# Altium PCB Power Board.PcbDoc
Units mil, origin at the board's own origin, x right, y up, seen from the top; angles counter-clockwise.
Board outline 4650 x 2500 mil, 2 copper layers (Top Layer, Bottom Layer); 55 components, 41 nets, 209 pads, 45 vias.
Unrouted connection lines stored in the file: 2.
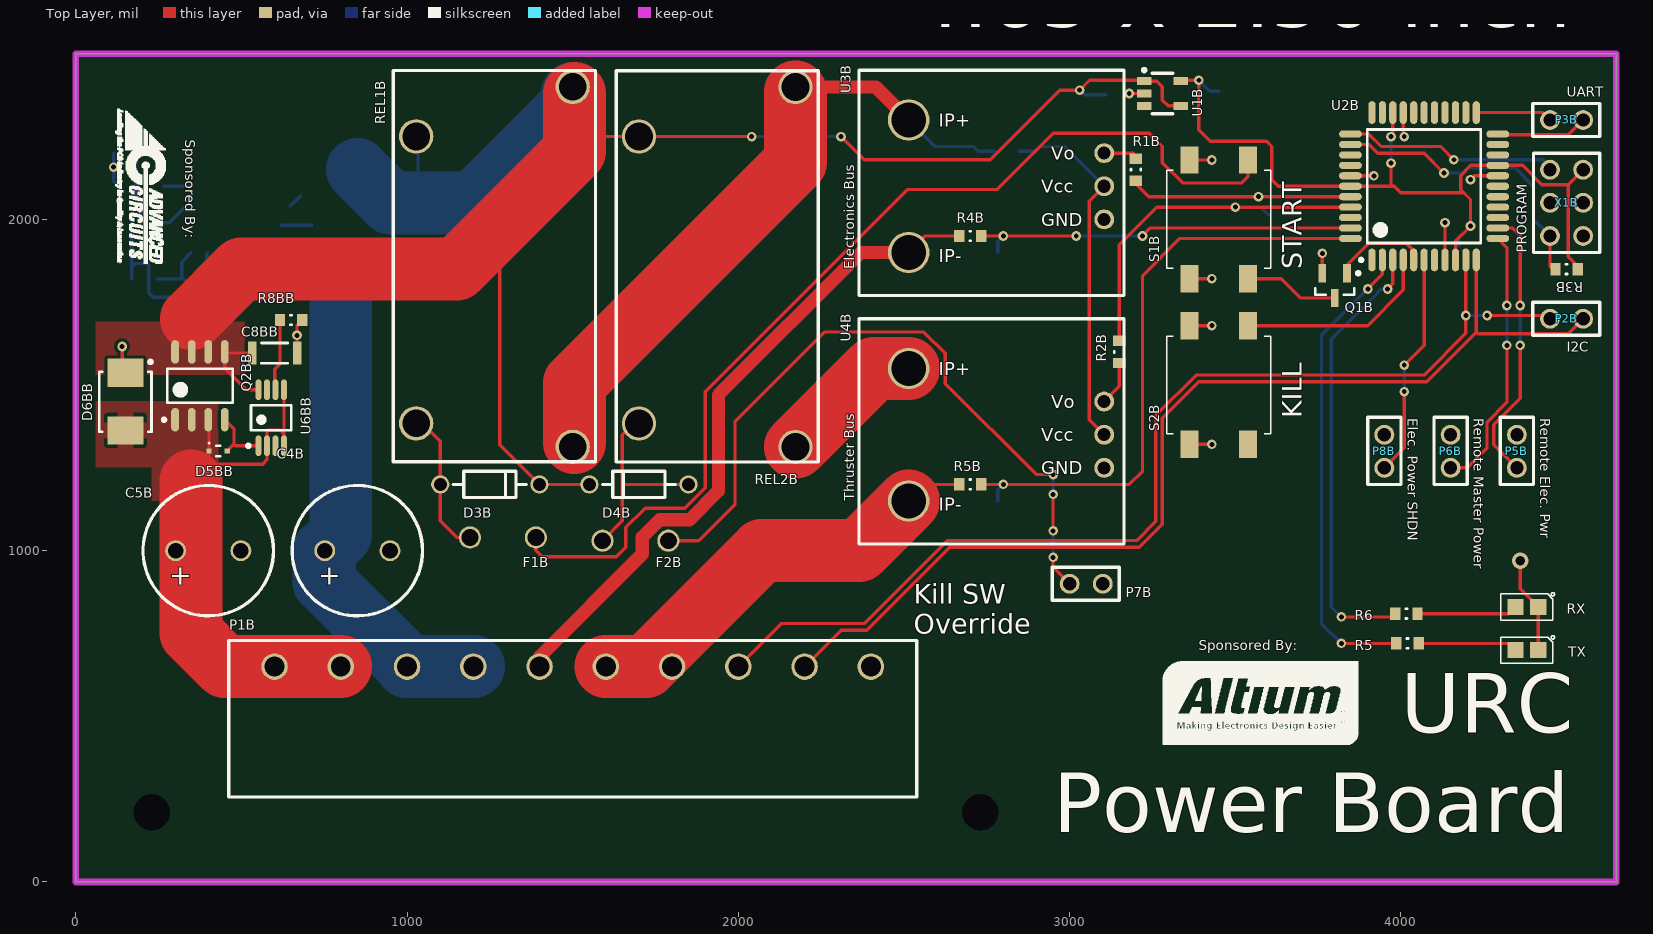
[diagram p0: Top Layer view]
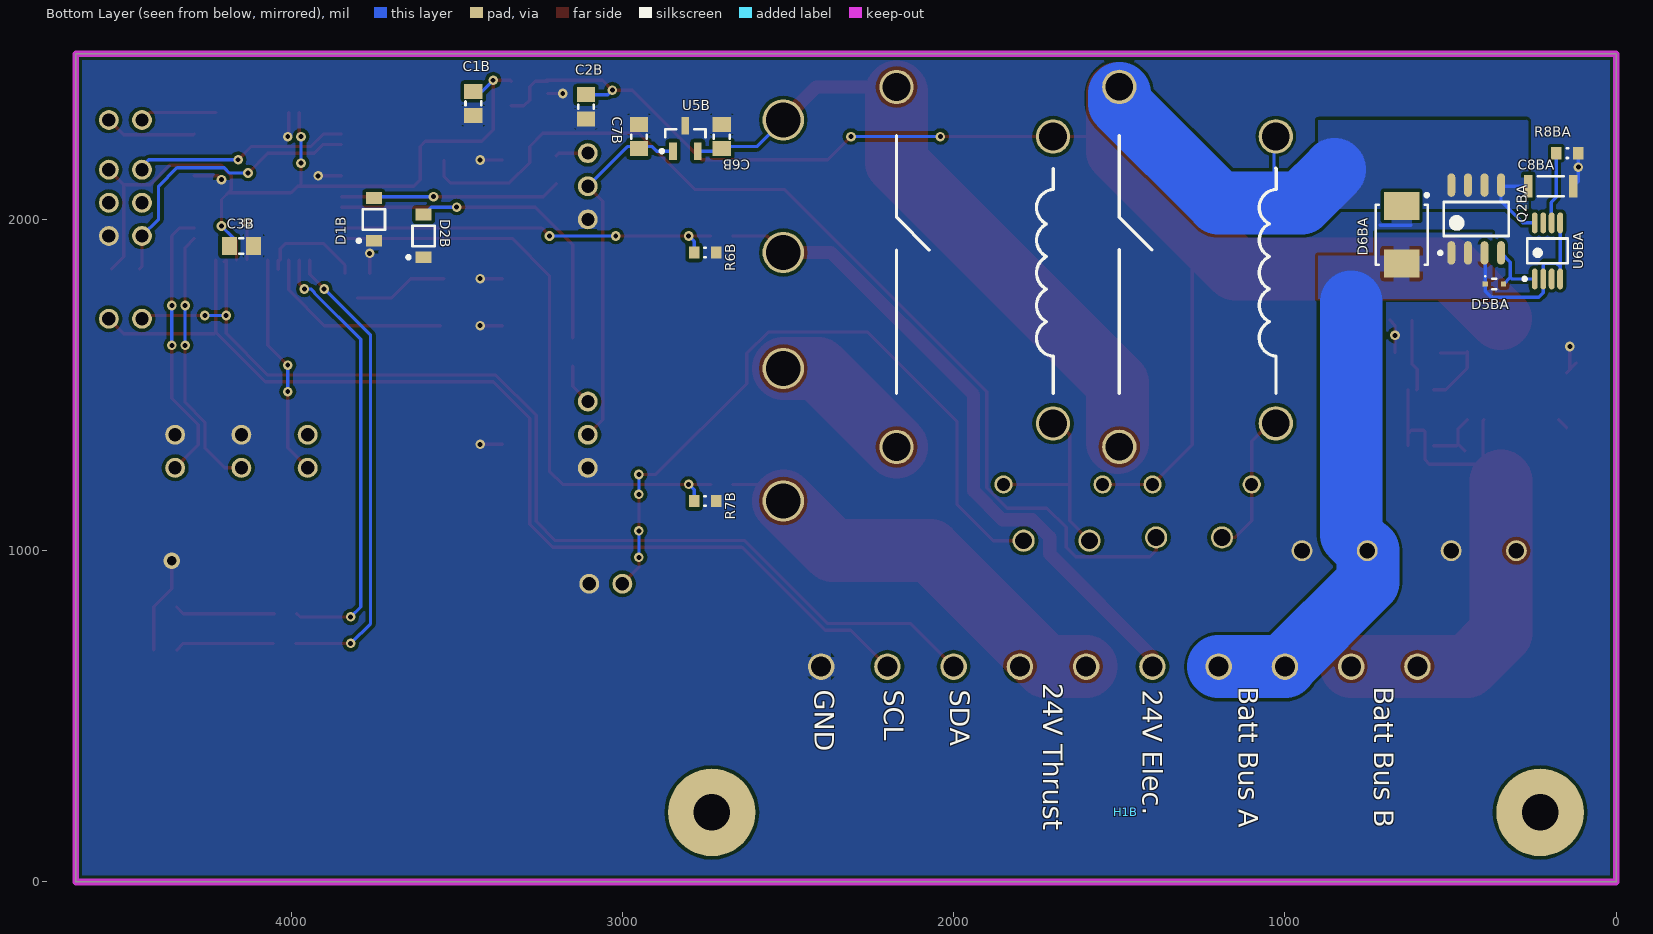
[diagram p1: Bottom Layer view, seen from below]

## Layer stack, top to bottom
Top Solder: solder mask 0.4, Solder Resist, Dk 3.5
Top Layer: signal copper 1.4
Dielectric 1: dielectric 12.6, FR-4, Dk 4.8
Bottom Layer: signal copper 1.4
Bottom Solder: solder mask 0.4, Solder Resist, Dk 3.5

## Board outline
0,0 0,2500 900,2500 4650,2500 4650,0

## Design rules (kind name [scope] priority, off if disabled: settings)
Clearance [All] p1: gap=10 ignorepadtopadclearanceinfootprint=FALSE except(0: Arc-Hole Track-Hole SMDPad-Hole THPad-Hole Via-Hole Fill-Hole Poly-Hole Region-Hole Text-Hole; 6: SMDPad-SMDPad)
Height [All] p1: minheight=0 maxheight=3000 prefheight=500
HoleSize [All] p1: absolutevalues=TRUE maxlimit=110 minlimit=15 maxpercent=80.000 minpercent=20.000
MinimumSolderMaskSliver [All] p1: minsoldermaskwidth=0
PolygonConnect GND [InNet('GND')] p1: connectstyle=Relief reliefconductorwidth=60 reliefentries=4 polygonreliefangle="90 Angle" airgapwidth=10
PolygonConnect Vias [IsVia and InNet('GND')] p2: connectstyle=Direct reliefconductorwidth=10 reliefentries=4 polygonreliefangle="90 Angle" airgapwidth=10
PolygonConnect "Battery Power" [InNet('BATTA') Or InNet('BATTB') Or InNet('RAW_24V')] p3: connectstyle=Relief reliefconductorwidth=50 reliefentries=4 polygonreliefangle="90 Angle" airgapwidth=10
PolygonConnect [All] p4: connectstyle=Relief reliefconductorwidth=10 reliefentries=4 polygonreliefangle="90 Angle" airgapwidth=10
RoomDefinition "U_Power Conditioning" [InComponentClass('U_Power Conditioning')] p1: confinementstyle=ConfineIn formatcopy=TRUE lockcomponents=FALSE outline -1000,-3400 1000,-3400 1000,-2400 -1000,-2400
RoomDefinition "Power Board" [InComponentClass('Power Board')] p2: confinementstyle=ConfineIn formatcopy=TRUE lockcomponents=FALSE outline -1000,-3400 1000,-3400 1000,-2400 -1000,-2400
RoomDefinition D1 [InComponentClass('D1')] p3: confinementstyle=ConfineIn formatcopy=TRUE lockcomponents=FALSE outline 50,1750 50,2250 750,2250 750,1750
RoomDefinition D2 [InComponentClass('D2')] p4: confinementstyle=ConfineIn formatcopy=TRUE lockcomponents=FALSE outline 750,1246.46 750,1746.46 50,1746.46 50,1246.46
RoutingVias [All] p1: holewidth=28 width=50 viastyle="Through Hole" minholewidth=28 minwidth=50 maxholewidth=28 maxwidth=50
SilkToSilkClearance [All] p1: silktosilkclearance=7
SilkToSolderMaskClearance [IsPad] p1: minsilkscreentomaskgap=0 clearancetoexposedcopper=FALSE
SolderMaskExpansion "Tented Vias" [IsVia] p1: expansion=-50
SolderMaskExpansion [All] p2: expansion=4
Width [All] p1: maxlimit=200 minlimit=10 preferedwidth=10
25 further rules are at their usual default settings.

## Classes and differential pairs
component class D1: C8BA D5BA D6BA Q2BA R8BA U6BA
component class D2: C8BB D5BB D6BB Q2BB R8BB U6BB
component class U_Microcontroller: C1B C2B C3B D1B D2B P2B P3B R1B R2B R3B R5 R6 RX TX U1B U2B X1B X6 X7
component class "U_Power Conditioning": C4B C5B C6B C7B D3B D4B F1B F2B P7B Q1B R4B R5B R6B R7B REL1B REL2B S1B S2B U3B U4B U5B
channel class "Diode Controllers": D1 D2 D3 D4
component class "Power Board": H1B P1B P5B P6B P8B

## Components (designator, comment, footprint, x,y, rotation, side; value= is the part's Value field where it differs from the comment)
C1B "0.1uF, C0805, AVX" C0805 3450,2350 r270 bottom value=0.1uF
C2B "0.1uF, C0805, AVX" C0805 3110,2340 r270 bottom value=0.1uF
C3B "0.1uF, C0805, AVX" C0805 4150,1920 r180 bottom value=0.1uF
C4B "330uF, Panasonic, 35V" "10mm Radial Cap, Generic" 850,1000 r0 top
C5B "330uF, Panasonic, 35V" "10mm Radial Cap, Generic" 400,1000 r0 top
C6B "0.1uF, C0805, AVX" C0805 2700,2250 r90 bottom value=0.1uF
C7B "0.1uF, C0805, AVX" C0805 2950,2250 r90 bottom value=0.1uF
C8BA "2.2uF, C1206 TY , Ceramic MLCC" C1206 197.75,2100 r0 bottom value=2.2uF (schematic designator C8B)
C8BB "2.2uF, C1206 TY , Ceramic MLCC" C1206 600,1596.46 r180 top value=2.2uF (schematic designator C8B)
D1B "MMSZ3V3T1G, 3V3 Zener Diode" ONSC-SOD123-2-498_A_V 3750,2000 r90 bottom value=3V3
D2B "MMSZ3V3T1G, 3V3 Zener Diode" ONSC-SOD123-2-498_A_V 3600,1950 r90 bottom value=3V3
D3B "Diode" DO-35-0.3 1250,1200 r0 top
D4B "Diode" DO-35-0.3 1700,1200 r180 top
D5BA "MM5Z12VT1G, 12V Zener" ONSC-SOD-523-2-502-01_C_V 367.75,1804.8 r180 bottom (schematic designator D5B)
D5BB "MM5Z12VT1G, 12V Zener" ONSC-SOD-523-2-502-01_C_V 430,1301.26 r0 top (schematic designator D5B)
D6BA "Bidirectional Zener" ONSC-SMB-2-403A-03_H_V 647.75,1953.54 r270 bottom value=28.2V (schematic designator D6B)
D6BB "Bidirectional Zener" ONSC-SMB-2-403A-03_H_V 150,1450 r270 top value=28.2V (schematic designator D6B)
F1B "PTC Fuse, LVR008NS" "LVR008NS - Resettable Fuse" 1190,1040 r0 top
F2B "PTC Fuse, LVR008NS" "LVR008NS - Resettable Fuse" 1590,1030 r0 top
H1B "Holes - x inch" "110mil Holes - 2.5  Inch" 1480,210 r180 top
P1B "MSTBA 2,5/10-G-5,08" "MSTBA 2,5/10-G-5,08" 600,650 r0 top
P2B "Header" "1x2 Header" 4500,1700 r180 top
P3B "Header" "1x2 Header" 4500,2300 r180 top
P5B "Header" "1x2 Header" 4350,1300 r90 top
P6B "Header" "1x2 Header" 4150,1300 r90 top
P7B "Header" "1x2 Header" 3050,900 r180 top
P8B "Header" "1x2 Header" 3950,1300 r90 top
Q1B "N-MOSFET" 2N7002-SOT23 3800,1800 r270 top
Q2BA "BSO033N03MS G" INF-PG-DSO-8-3_N 422.75,2001.18 r90 bottom (schematic designator Q2B)
Q2BB "BSO033N03MS G" INF-PG-DSO-8-3_N 375,1497.64 r90 top (schematic designator Q2B)
R1B "Resistor" R0603 3200,2150 r90 top value=680
R2B "Resistor" R0603 3150,1600 r270 top value=680
R3B "Resistor" R0603 4500,1850 r0 top value=10K
R4B "Resistor" R0603 2700,1950 r180 top value=10K
R5 "Resistor" R0603 4020,720 r0 top value=1K
R5B "Resistor" R0603 2700,1200 r180 top value=10K
R6 "Resistor" R0603 4016.54,810 r0 top value=1K
R6B "Resistor" R0603 2750,1900 r0 bottom value=2K
R7B "Resistor" R0603 2750,1150 r0 bottom value=2K
R8BA "Resistor" R0603 147.75,2200 r0 bottom value=1K (schematic designator R8B)
R8BB "Resistor" R0603 650,1696.46 r180 top value=1K (schematic designator R8B)
REL1B "ALFG2PF24" "LF-G SERIES RELAY" 1500,2400 r270 top
REL2B "ALFG2PF24" "LF-G SERIES RELAY" 2172.44,2399.61 r270 top
RX "LED" LED0805 4380,830 r90 top (schematic designator D4)
S1B "FSM2JSMA" FSM2JSMA 3450,2000 r0 top
S2B "FSM2JSMA" FSM2JSMA 3450,1500 r180 top
TX "LED" LED0805 4380,700 r90 top (schematic designator D3)
U1B "MCP1804T-3302I/OT" MCP1804T-3302I/OT 3280,2380 r270 top
U2B "ATxmega16D4-AU" 44A_N 4070,2100 r90 top
U3B "AC715 Current Sensor" "AC715 Current Sensor" 3104.33,2100 r0 top
U4B "AC715 Current Sensor" "AC715 Current Sensor" 3104.33,1350 r0 top
U5B "LM3480" LM4040-SOT23-3 2810,2244.33 r90 bottom
U6BA "LTC4359CMS8#PBF" LT-MS8-8_N 207.75,1904.8 r90 bottom (schematic designator U6B)
U6BB "LTC4359CMS8#PBF" LT-MS8-8_N 590,1401.26 r90 top (schematic designator U6B)
X1B "Header" "2X3 HEADER" 4500,2050 r270 top

## Footprints (in the part's own frame and the unit in brackets; to place one, negate y for a bottom-side part, rotate by r counter-clockwise, add the part's x,y. Pads: shape width x height; smd on the part's side, far side on the other; paste and mask are expansions set on the pad)
"1x2 Header" [mil]
  round 60 hole 40: 1(-50,0) 2(50,0)
  silkscreen extent -100,-50 102,50, body extent -100,-50 100,50, height 374
2N7002-SOT23 [mm] "SOT23, 3-Leads, Body 3.0x2.5mm (max), Pitch 0.95mm, IPC Medium Density"
  rect 1.4x0.6 smd: D(0.95,0) G(-0.95,0.95) S(-0.95,-0.95)
  silkscreen extent -1.07,-1.5 0.7,1.93, body extent -0.7,-1.5 0.7,1.5, height 1.1
"2X3 HEADER" [mil]
  round 60 hole 40: 1(-100,-50) 2(-100,50) 3(0,-50) 4(0,50) 5(100,-50) 6(100,50)
  silkscreen extent -150,-100 150,100, body extent -150,-100 150,100, height 374
"10mm Radial Cap, Generic" [mm]
  round 1.6 hole 1.2: 1(-2.5,0) 2(2.5,0)
  silkscreen extent -5,-5 5,5, body extent -5,-5 5,5, height 23
44A_N [mm] "Thin QFP, 44-Leads, Body 10x10mm, Pitch 0.8mm, IPC Medium Density"
  oval 1.75x0.55 smd: 1(-5.65,4) 2(-5.65,3.2) 3(-5.65,2.4) 4(-5.65,1.6) 5(-5.65,0.8) 6(-5.65,0) 7(-5.65,-0.8) 8(-5.65,-1.6) 9(-5.65,-2.4) 10(-5.65,-3.2) 11(-5.65,-4) 23(5.65,-4) 24(5.65,-3.2) 25(5.65,-2.4) 26(5.65,-1.6) 27(5.65,-0.8) 28(5.65,0) 29(5.65,0.8) 30(5.65,1.6) 31(5.65,2.4) 32(5.65,3.2) 33(5.65,4)
  oval 0.55x1.75 smd: 12(-4,-5.65) 13(-3.2,-5.65) 14(-2.4,-5.65) 15(-1.6,-5.65) 16(-0.8,-5.65) 17(0,-5.65) 18(0.8,-5.65) 19(1.6,-5.65) 20(2.4,-5.65) 21(3.2,-5.65) 22(4,-5.65) 34(4,5.65) 35(3.2,5.65) 36(2.4,5.65) 37(1.6,5.65) 38(0.8,5.65) 39(0,5.65) 40(-0.8,5.65) 41(-1.6,5.65) 42(-2.4,5.65) 43(-3.2,5.65) 44(-4,5.65)
  silkscreen extent -5.77,-4.35 4.35,4.95, body extent -5,-5 5,5, height 1.2
"110mil Holes - 2.5  Inch" [mil]
  round 0 hole 110: 0(-1250,0) 0(1250,0)
  round 264 smd far side: 0(-1250,0) 0(1250,0)
"AC715 Current Sensor" [mil]
  round 125 hole 105: 1(-590,200) 2(-590,-200)
  round 60 hole 39.37: 3(0,-100) 4(0,100) 5(0,0)
  silkscreen extent -740,-330 60,350, body extent -740,-350 60,350, height 600
C0805 [mm] "Chip Capacitor, 2-Leads, Body 2.0x1.3mm, IPC Medium Density"
  rect 1.15x1.4 smd: 1(-0.925,0) 2(0.925,0)
  silkscreen extent -0.15,-0.6 0.15,0.6, body extent -1,-0.63 1,0.63, height 0.6
C1206 [mm] "Chip Capacitor, 2-Leads, Body 3.2x1.6mm, IPC Medium Density"
  rect 0.65x1.75 smd: 1(-1.725,0) 2(1.725,0)
  silkscreen extent -1,-0.77 1,0.77, body extent -1.6,-0.8 1.6,0.8, height 1.3
DO-35-0.3 [mm] "0.3\" Diode DO-35"
  round 1.4 hole 1: 1(-3.8,0) 2(3.8,0)
  silkscreen extent -2.8,-1 2.8,1
FSM2JSMA [mm] "SPST OFF-MOM Switch"
  rect 1.4x2.1 smd: 1(2.24,4.55) 2(2.24,-4.55) 3(-2.24,4.55) 4(-2.24,-4.55)
  silkscreen extent -4,-3.75 4,3.75, body extent -3,-5 3,5, height 4.28
INF-PG-DSO-8-3_N [mm] "SOP, 8-Leads, Body 4.9x3.9mm, Pitch 1.27mm, IPC Medium Density"
  oval 1.8x0.6 smd: 1(-2.6,1.905) 2(-2.6,0.635) 3(-2.6,-0.635) 4(-2.6,-1.905) 5(2.6,-1.905) 6(2.6,-0.635) 7(2.6,0.635) 8(2.6,1.905)
  silkscreen extent -2.72,-2.5 1.3,2.88, body extent -2,-2.5 2,2.5, height 1.75
LED0805 [mm] "0805 LED"
  rect 1.2x1.25 smd: 1(0,-0.875) 2(0,0.875)
  silkscreen extent -1,-2.13 1.1,2
"LF-G SERIES RELAY" [mm]
  round 2.635 hole 2.127: 1(25.8,-12) 2(3.8,-12) 3(27.6,0) 4(0,0)
  silkscreen extent -1.25,-13.75 28.75,1.75, body extent -1.25,-13.88 28.85,1.83, height 23.3
LM4040-SOT23-3 [mm] "LM4040, Precision fixed/adjustable regulator"
  rect 1.35x0.6 smd: 1(-0.975,0.95) 2(-0.975,-0.95) 3(0.975,0)
  silkscreen extent -1.1,-1.55 0.7,1.93, body extent -0.7,-1.55 0.7,1.55, height 1.15
LT-MS8-8_N [mm] "SOP, 8-Leads, Body 3.1x3.1mm, Pitch 0.65mm, IPC Medium Density"
  oval 1.6x0.45 smd: 1(-2.15,0.975) 2(-2.15,0.325) 3(-2.15,-0.325) 4(-2.15,-0.975) 5(2.15,-0.975) 6(2.15,-0.325) 7(2.15,0.325) 8(2.15,0.975)
  silkscreen extent -2.27,-1.55 0.95,1.88, body extent -1.55,-1.55 1.55,1.55, height 1.1
"LVR008NS - Resettable Fuse" [mm] "5x20mm Fuse Holder"
  round 1.7 hole 1.3: 1(0,0) 2(5.05,0)
  body extent -2.13,-3.27 7.24,3.29, height 15.45
MCP1804T-3302I/OT [mm] "SOT-23"
  rect 0.6x1.1 smd: NC(0.95,-1.4) SHDN(0.95,1.4) Vin(-0.95,-1.4) Vout(-0.95,1.4) Vss(0,-1.4)
  silkscreen extent -1.8,-1.4 1.55,0.8, body extent -1.5,-1.63 1.5,1.58, height 0.92
"MSTBA 2,5/10-G-5,08" [mm] "Header, Male, 10 Pin, 90deg"
  round 2.03 hole 1.53: 1(0,0) 2(5.08,0) 3(10.16,0) 4(15.24,0) 5(20.32,0) 6(25.4,0) 7(30.48,0) 8(35.56,0) 9(40.64,0) 10(45.72,0)
  silkscreen extent -3.5,-10 49.25,2, body extent -3.53,-10 49.27,2, height 8.6
ONSC-SMB-2-403A-03_H_V [mil] "Molded, 2-Leads, Body 4.6x3.95mm"
  rect 85x107.99 smd: 1(87.01,0) 2(-87.01,0)
  silkscreen extent -125,-79 91,81, body extent -91,-78 91,78, height 95
ONSC-SOD123-2-498_A_V [mm] "SOD, 2-Leads, Body 2.7x1.65mm"
  rect 0.91x1.22 smd: A(-1.635,0) K(1.635,0)
  silkscreen extent -1.76,-0.85 0.78,1.29, body extent -1.92,-1.08 1.93,1.08, height 1.35
ONSC-SOD-523-2-502-01_C_V [mm] "SOD, 2-Leads, Body 1.2x0.8mm"
  rect 0.4x0.4 smd: 1(-0.7,0) 2(0.7,0)
  silkscreen extent -0.75,-0.4 0.15,0.65, body extent -0.6,-0.4 0.6,0.4, height 0.7
R0603 [mm] "Chip Resistor, 2-Leads, Body 1.5x0.8mm, IPC Medium Density"
  rect 0.8x0.95 smd: 1(-0.85,0) 2(0.85,0)
  silkscreen extent -0.05,-0.38 0.05,0.38, body extent -0.77,-0.4 0.77,0.4, height 0.45

## Part data
C1B C2B C3B C6B C7B: "Ceramic MLCC, AVX, X5R Dielectric", Capacitance="0.1 F", Capacitance Tolerance=5%, Ceramic Capacitor Case="0805 [2012 Metric]", Dielectric Characteristic=X7, Manufacturer 1=AVX, Manufacturer Part Number=08055C104JAT2A, Operating Temperature Min="-55 C", Supplier Part Number 1=96K4778, Voltage Rating=50, ComponentLink1Description=http://www.farnell.com/datasheets/1818074.pdf, ComponentLink1URL=http://www.farnell.com/datasheets/1818074.pdf, Description 1="AVX - 08055C104JAT2A - MLCC CAPACITOR, 0.1uF, 50V, X7R, 5%, 0805", Pricing 1="1=0.009, 10=0.009, 100=0.009, 250=0.009, 500=0.009, 1000=0.009 (USD)", Product Range=-, RoHS=YES, Stock 1=26154, Supplier 1=Newark
C4B C5B: Capacitance="330 F", Capacitance Tolerance=20%, Capacitor Terminals="Radial Leaded", Manufacturer 1="PANASONIC ELECTRONIC COMPONENTS", Manufacturer Part Number=ECA-1VHG331, Supplier Part Number 1=17T5027, Voltage Rating=35, ComponentLink1Description=http://www.farnell.com/cad/1703906.zip, ComponentLink1URL=http://www.farnell.com/cad/1703906.zip, ComponentLink2Description=http://www.farnell.com/datasheets/1903322.pdf, ComponentLink2URL=http://www.farnell.com/datasheets/1903322.pdf, Description 1="PANASONIC ELECTRONIC COMPONENTS - ECA-1VHG331 - ALUMINUM ELECTROLYTIC CAPACITOR, 330UF, 20%, 35V, RADIAL", Diameter=10, ESR=-, Packaging=Each, Pricing 1="1=0.575, 10=0.38, 25=0.324, 50=0.276, 100=0.246, 250=0.213, 500=0.182, 1000=0.147 (USD)", Product Range="NHG Series", RoHS=YES, Stock 1=465, Supplier 1=Newark
C8BA C8BB: "Ceramic MLCC, Taiyo Yuden, X7R Dielectric", Manufacturer 1="TAIYO YUDEN", Manufacturer Part Number=UMK316F225ZG-T, Supplier Part Number 1=08P5201, ComponentLink1Description=http://www.yuden.co.jp/productdata/catalog/en/mlcc_pack_e.pdf, ComponentLink1URL=http://www.yuden.co.jp/productdata/catalog/en/mlcc_pack_e.pdf, ComponentLink2Description=http://www.farnell.com/datasheets/1481447.pdf, ComponentLink2URL=http://www.farnell.com/datasheets/1481447.pdf, Description 1="TAIYO YUDEN - UMK316F225ZG-T - CERAMIC CAPACITOR, 2.2UF, 50V, Y5V, +80,-20%, 1206", Pricing 1="1=0.055, 10=0.055, 50=0.055, 100=0.055, 500=0.055, 1000=0.05 (USD)", RoHS=YES, Stock 1=1843, Supplier 1=Newark
D1B D2B: "3V3 Zener Diode", Manufacturer 1="ON SEMICONDUCTOR", Manufacturer Part Number=MMSZ3V3T1G, Supplier Part Number 1=71J6023, ComponentLink1Description=http://www.farnell.com/datasheets/78656.pdf, ComponentLink1URL=http://www.farnell.com/datasheets/78656.pdf, Description 1="ON SEMICONDUCTOR - MMSZ3V3T1G - ZENER DIODE, 500mW, 3.3V, SOD-123", Pricing 1="1=0.24, 50=0.156, 100=0.065, 250=0.063, 500=0.061, 1000=0.044, 3000=0.035, 9000=0.029 (USD)", RoHS=YES, Stock 1=30308, Supplier 1=Newark
D3B D4B: "General Purpose Diode", Forward Current If(AV)=200, Forward Surge Current Ifsm Max=4, Forward Voltage VF Max=1, Manufacturer 1="FAIRCHILD SEMICONDUCTOR", Manufacturer Part Number=1N4148TR, Repetitive Reverse Voltage Vrrm Max=100, Supplier Part Number 1=05R0353, ComponentLink1Description=http://www.farnell.com/datasheets/1934602.pdf, ComponentLink1URL=http://www.farnell.com/datasheets/1934602.pdf, ComponentLink2Description=http://www.fairchildsemi.com/ds/1N%2F1N4148.pdf, ComponentLink2URL=http://www.fairchildsemi.com/ds/1N%2F1N4148.pdf, Description 1="FAIRCHILD SEMICONDUCTOR - 1N4148TR - SMALL SIGNAL DIODE 100V 200mA DO-35", Diode Configuration=Single, Pricing 1="1=0.063, 10=0.052, 100=0.018, 1000=0.013, 2500=0.01 (USD)", Reverse Recovery Time trr Max=4, RoHS=YES, Stock 1=12584, Supplier 1=Newark
D5BA D5BB: "Zener diode", Diode Case Style=SOD-523, Manufacturer 1="ON SEMICONDUCTOR", Manufacturer Part Number=MM5Z12VT1G, Operating Temperature Max="150 C", Power Dissipation Pd=200, Supplier Part Number 1=09R9512, Zener Tolerance=-, Zener Voltage Vz Typ=12V, ComponentLink1Description=http://www.farnell.com/datasheets/1840567.pdf, ComponentLink1URL=http://www.farnell.com/datasheets/1840567.pdf, Description 1="ON SEMICONDUCTOR - MM5Z12VT1G - ZENER DIODE, 200mW, 12V, SOD-523", Filter Terminals=SMD, No. of Pins=2, Packaging="Cut Tape", Pricing 1="1=0.249, 50=0.162, 100=0.068, 250=0.066, 500=0.064, 1000=0.046, 3000=0.037, 9000=0.03 (USD)", RoHS=YES, Stock 1=4492, Supplier 1=Newark
D6BA D6BB: library part "P6SMB33CAT3G 28.2V Bidirectional Zener", "Bidirectional Zener diode", Manufacturer 1="ON SEMICONDUCTOR", Manufacturer Part Number=P6SMB33CAT3G, Supplier Part Number 1=42K2552, ComponentLink1Description=http://www.farnell.com/datasheets/1576153.pdf, ComponentLink1URL=http://www.farnell.com/datasheets/1576153.pdf, Description 1="ON SEMICONDUCTOR - P6SMB33CAT3G - TVS DIODE, 600W, 33V, SMB", Pricing 1="1=0.543, 50=0.36, 100=0.202, 250=0.195, 500=0.19, 1000=0.151, 2500=0.13, 7500=0.126 (USD)", RoHS=YES, Stock 1=6401, Supplier 1=Newark
F1B F2B: "Generic Fuse", Holding Current=80, Manufacturer 1="TE CONNECTIVITY / RAYCHEM", Manufacturer Part Number=LVR008NS, Operating Temperature Min="-40 C", Supplier Part Number 1=45P7788, Tripping Current=190, Voltage Rating=240, ComponentLink1Description=http://www.farnell.com/datasheets/1902602.pdf, ComponentLink1URL=http://www.farnell.com/datasheets/1902602.pdf, Description 1="TE CONNECTIVITY / RAYCHEM - LVR008NS - FUSE, PTC RESET, 240V, 80mA, RADIAL", External Depth=4.6, Pricing 1="1=0.46, 10=0.46, 100=0.409, 500=0.369, 1000=0.318, 2000=0.312, 5000=0.29, 10000=0.247 (USD)", Product Range="PolySwitch LVR Series", RoHS=YES, Stock 1=919, Supplier 1=Newark, Thermistor Mounting="Through Hole"
P1B: "Header, 10-Pin", Manufacturer 1="PHOENIX CONTACT", Manufacturer Part Number="MSTBA 2,5/10-G-5,08-LR", Supplier Part Number 1=88W5041, ComponentLink1Description=http://www.farnell.com/datasheets/1702208.pdf, ComponentLink1URL=http://www.farnell.com/datasheets/1702208.pdf, Description 1="PHOENIX CONTACT - MSTBA 2,5/10-G-5,08-LR - TERMINAL BLOCK, HEADER, 10POS, TH", Pricing 1="1=3.07, 100=2.89, 250=2.67, 500=2.55, 1000=2.27 (USD)", RoHS=YES, Stock 1=37, Supplier 1=Newark, URL=http://www.mouser.com/ProductDetail/Phoenix-Contact/1792708/?qs=sGAEpiMZZMsDddcp1dBDJI66tvLKBAoKnRJwuCPjeJk%3d
P2B P3B P5B P6B P7B P8B: library part "1x2 Header", "1x2 Header"
Q1B: "N-Channel MOSFET", Manufacturer 1="ON SEMICONDUCTOR", Manufacturer Part Number=2N7002ET1G, Supplier Part Number 1=09R9861, ComponentLink1Description=http://www.farnell.com/datasheets/1708226.pdf, ComponentLink1URL=http://www.farnell.com/datasheets/1708226.pdf, Description 1="ON SEMICONDUCTOR - 2N7002ET1G - N CHANNEL MOSFET, 60V, 310mA SOT-23", Pricing 1="1=0.018, 50=0.018, 100=0.018, 250=0.018, 500=0.018, 1000=0.018, 3000=0.016, 9000=0.016 (USD)", RoHS=YES, Stock 1=18061, Supplier 1=Newark
Q2BA Q2BB: "N-Channel OptiMOS 3 M-Series Power-MOSFET, 30 V VDS, 22 A ID, -55 to 150 degC, PG-DSO-8-16, Reel, Green", Continuous Drain Current Id=17, Drain Source Voltage Vds=30, Manufacturer 1=INFINEON, On Resistance Rds(on)=0.0028, Rds(on) Test Voltage Vgs=10, Supplier Part Number 1=47W3322, Threshold Voltage Vgs=2, ComponentLink1Description=http://www.farnell.com/datasheets/1648231.pdf, ComponentLink1URL=http://www.farnell.com/datasheets/1648231.pdf, Description 1="INFINEON - BSO033N03MS G - MOSFET, N CHANNEL, 30V, 17A, 8DSO", Manufacturer Part Number="BSO033N03MS G", No. of Pins=8, Pricing 1="1=0.868, 10=0.742, 25=0.662, 100=0.594, 250=0.525, 500=0.445, 1000=0.389, 2500=0.358 (USD)", RoHS=YES, Stock 1=1339, Supplier 1=Newark, Transistor Polarity="N Channel"
R1B R2B: library part "680, 5%, 100mW, Yageo, R0603", Manufacturer 1=YAGEO, Manufacturer Part Number=RC0603JR-07680RL, Power Rating=100, Resistance=680, Resistance Tolerance=5%, Resistor Case Style="0603 [1608 Metric]", Supplier Part Number 1=68R0206, Voltage Rating=50, Body Width=0.8, ComponentLink1Description=http://past.yageo.com/pdf/PYu-R_Packing_6.pdf, ComponentLink1URL=http://past.yageo.com/pdf/PYu-R_Packing_6.pdf, ComponentLink2Description=http://www.farnell.com/cad/1538988.zip, ComponentLink2URL=http://www.farnell.com/cad/1538988.zip, ComponentLink3Description=http://www.farnell.com/datasheets/1868787.pdf, ComponentLink3URL=http://www.farnell.com/datasheets/1868787.pdf, ComponentLink4Description=http://www.yageo.com/pdf/PYu-RC0603_51_RoHS_L_4.pdf, ComponentLink4URL=http://www.yageo.com/pdf/PYu-RC0603_51_RoHS_L_4.pdf, Description 1="YAGEO - RC0603JR-07680RL - RES, THICK FILM, 680R, 5%, 0.1W, 0603", MSL=-, Packaging="Cut Tape", Pricing 1="1=0.07, 10=0.012, 25=0.008, 100=0.005, 250=0.004, 1000=0.002 (USD)", Product Range="RC Series", RoHS=YESX, Stock 1=8787, Supplier 1=Newark, Tolerance=5%
R3B R4B R5B: library part "10k, 1%, 100mW, Yageo, R0603", Manufacturer 1=YAGEO, Manufacturer Part Number=RC0603FR-1010KL, Power Rating=100, Resistance=10, Resistance Tolerance=1%, Resistor Case Style="0603 [1608 Metric]", Supplier Part Number 1=68R0120, Voltage Rating=50, Body Length=1.6, ComponentLink1Description=http://www.farnell.com/datasheets/1868787.pdf, ComponentLink1URL=http://www.farnell.com/datasheets/1868787.pdf, ComponentLink2Description=http://www.yageo.com/pdf/PYu-RC0603_51_RoHS_L_4.pdf, ComponentLink2URL=http://www.yageo.com/pdf/PYu-RC0603_51_RoHS_L_4.pdf, Description 1="YAGEO - RC0603FR-1010KL - RES, THICK FILM, 10K, 1%, 0.1W, 0603", MSL=-, Packaging="Cut Tape", Pricing 1="1=0.002, 10=0.002, 25=0.002, 100=0.002, 250=0.002, 1000=0.002 (USD)", Product Range="RC Series", RoHS=YESX, Stock 1=7839, Supplier 1=Newark, Tolerance=1%
R5 R6 R8BA R8BB: library part "1k, 5%, 100mW, Yageo, R0603", Manufacturer 1=YAGEO, Manufacturer Part Number=RC0603JR-131KL, Power Rating=100, Resistance=1, Resistance Tolerance=5%, Resistor Case Style="0603 [1608 Metric]", Supplier Part Number 1=68R0220, Voltage Rating=50, Body Height=0.45, ComponentLink1Description=http://www.farnell.com/datasheets/1868787.pdf, ComponentLink1URL=http://www.farnell.com/datasheets/1868787.pdf, ComponentLink2Description=http://www.yageo.com/pdf/PYu-RC0603_51_RoHS_L_4.pdf, ComponentLink2URL=http://www.yageo.com/pdf/PYu-RC0603_51_RoHS_L_4.pdf, Description 1="YAGEO - RC0603JR-131KL - RES, THICK FILM, 1K, 5%, 0.1W, 0603", MSL=-, Packaging="Cut Tape", Pricing 1="1=0.06, 10=0.011, 25=0.008, 100=0.005, 250=0.003, 1000=0.002 (USD)", Product Range="RC Series", RoHS=YESX, Stock 1=36430, Supplier 1=Newark, Tolerance=5%
R6B R7B: library part "2k, 1%, 100mW, Yageo, R0603", Manufacturer 1=YAGEO, Manufacturer Part Number=RC0603FR-072KL, Supplier Part Number 1=68R0063, Tolerance=1%, ComponentLink1Description=http://www.farnell.com/datasheets/1868787.pdf, ComponentLink1URL=http://www.farnell.com/datasheets/1868787.pdf, ComponentLink2Description=http://www.yageo.com/pdf/PYu-RC0603_51_RoHS_L_4.pdf, ComponentLink2URL=http://www.yageo.com/pdf/PYu-RC0603_51_RoHS_L_4.pdf, Description 1="YAGEO - RC0603FR-072KL - RES, THICK FILM, 2K, 1%, 0.1W, 0603", Pricing 1="1=0.09, 10=0.015, 25=0.011, 100=0.006, 250=0.004, 1000=0.003 (USD)", RoHS=YESX, Stock 1=2730, Supplier 1=Newark
REL1B REL2B: "24V, 33A General Purpose Relay", Manufacturer 1="PANASONIC ELECTRIC WORKS", Supplier Part Number 1=31T8165, ComponentLink1Description=http://www.farnell.com/datasheets/1022057.pdf, ComponentLink1URL=http://www.farnell.com/datasheets/1022057.pdf, ComponentLink2Description=http://www.farnell.com/datasheets/1012515.pdf, ComponentLink2URL=http://www.farnell.com/datasheets/1012515.pdf, Description 1="PANASONIC ELECTRIC WORKS - ALFG2PF24 - RELAY, SPST-NO, 277VAC, 31A", Manufacturer Part Number=ALFG2PF24, Pricing 1="1=6.62, 100=5.41, 250=4.96, 500=4.61, 1000=4.33 (USD)", RoHS=YES, Stock 1=55, Supplier 1=Newark
S1B S2B: "Tactile Switch (OFF-MOM)", Manufacturer 1="TE CONNECTIVITY / ALCOSWITCH", Supplier Part Number 1=92F2864, ComponentLink1Description=http://www.tycoelectronics.com/commerce/DocumentDelivery/DDEController?Action=showdoc&DocId=Catalog+Section%7F1308111-1_SWITCHES_CORE_PROGRAM_CATALOG%7F0308%7Fpdf%7FEnglish%7FENG_CS_1308111-1_SWITCHES_CORE_PROGRAM_CATALOG_0308.pdf%7F1825041-1, ComponentLink1URL=http://www.tycoelectronics.com/commerce/DocumentDelivery/DDEController?Action=showdoc&DocId=Catalog+Section%7F1308111-1_SWITCHES_CORE_PROGRAM_CATALOG%7F0308%7Fpdf%7FEnglish%7FENG_CS_1308111-1_SWITCHES_CORE_PROGRAM_CATALOG_0308.pdf%7F1825041-1, ComponentLink2Description=http://www.farnell.com/cad/1650702.pdf, ComponentLink2URL=http://www.farnell.com/cad/1650702.pdf, ComponentLink3Description=http://www.farnell.com/datasheets/1668117.pdf, ComponentLink3URL=http://www.farnell.com/datasheets/1668117.pdf, ComponentLink4Description=http://www.farnell.com/datasheets/921681.pdf, ComponentLink4URL=http://www.farnell.com/datasheets/921681.pdf, ComponentLink5Description=http://ecommas.tycoelectronics.com/commerce/DocumentDelivery/DDEController?Action=showdoc&DocId=Catalog+Page%7F1308390_0904_E3_E10%7Fn%2Fa%7Fpdf%7FEnglish%7FENG_CAT_1308390_0904_E3_E10_.pdf, ComponentLink5URL=http://ecommas.tycoelectronics.com/commerce/DocumentDelivery/DDEController?Action=showdoc&DocId=Catalog+Page%7F1308390_0904_E3_E10%7Fn%2Fa%7Fpdf%7FEnglish%7FENG_CAT_1308390_0904_E3_E10_.pdf, Description 1="TE CONNECTIVITY / ALCOSWITCH - FSM2JSMA - SWITCH, TACTILE, SPST-NO, 50mA, SMD", Manufacturer Part Number=FSM2JSMA, Pricing 1="1=0.28, 10=0.262, 25=0.253, 50=0.244, 100=0.23, 250=0.217, 500=0.208, 1000=0.158 (USD)", RoHS=YES, Stock 1=273, Supplier 1=Newark, URL=http://search.digikey.com/us/en/products/FSM2JSMA/450-1130-ND/525819
U1B: "3.3V Linear Regulator", Dropout Voltage Vdo=260, Input Voltage Max=28, Input Voltage Min=2, LDO Regulator Case Style=SOT-23, Manufacturer 1=MICROCHIP, Operating Temperature Min="-40 C", Output Current=150, Supplier Part Number 1=55R1047, ComponentLink1Description=http://www.farnell.com/datasheets/1789199.pdf, ComponentLink1URL=http://www.farnell.com/datasheets/1789199.pdf, ComponentLink2Description=http://www.farnell.com/cad/1790647.zip, ComponentLink2URL=http://www.farnell.com/cad/1790647.zip, Description 1="MICROCHIP - MCP1804T-3302I/OT - LDO VOLTAGE REGULATOR, 3.3V, 150mA, 5-SOT-23", Manufacturer Part Number=MCP1804T-3302I/OT, No. of Pins=5, Pricing 1="1=0.67, 26=0.56, 100=0.51 (USD)", RoHS=YES, Stock 1=12, Supplier 1=Newark, URL=http://www.newark.com/microchip/mcp1804t-3302i-ot/ldo-voltage-regulator-3-3v-150ma/dp/55R1047
U2B: "8/16-bit AVR XMEGA D4 Microcontroller, 1.6-3.6V, 32MHz, 16KB + 4KB Flash, 1KB EEPROM, 2KB SRAM, 44-pin TQFP, Industrial Grade (-40°C to 85°C), Pb-Free", Manufacturer 1=ATMEL, Manufacturer Part Number=ATXMEGA16D4-AU, MCU Case Style=TQFP, Supplier Part Number 1=68T3906, Supply Voltage Min=1.6, Code_JEDEC=MS-026-ACB, ComponentLink1Description="Manufacturer URL", ComponentLink1URL=http://www.atmel.com/, ComponentLink2Description="ATxmega128D4/64D4/32D4/16D4 Datasheet", ComponentLink2URL=http://www.atmel.com/dyn/resources/prod_documents/doc8135.pdf, ComponentLink3Description=http://www.farnell.com/datasheets/1693882.pdf, ComponentLink3URL=http://www.farnell.com/datasheets/1693882.pdf, ComponentLink4Description=http://www.farnell.com/cad/1773743.zip, ComponentLink4URL=http://www.farnell.com/cad/1773743.zip, ComponentLink5Description=http://bcove.me/gu8hm7kh, ComponentLink5URL=http://bcove.me/gu8hm7kh, Controller Family/Series=ATxmega, CPU Speed=32, DatasheetVersion="revJ, Dec-2010", Description 1="ATMEL - ATXMEGA16D4-AU - MICROCONTROLLER MCU, 8 BIT, AVR XMEGA, 32MHZ, TQFP-44", No. of I/O's=34, No. of Pins=44, PackageDescription="44-Pin Plastic Thin Profile Quad Flat Pack, 10 x 10 x 1.0 mm Body, 0.8 mm Pitch (TQFP)", PackageReference=44A, PackageVersion="revC, Oct-2010", Pricing 1="1=2.71, 10=2.38, 25=2.24, 50=1.9, 100=1.79, 250=1.72, 500=1.69, 1000=1.49 (USD)", Program Memory Size=16, RAM Memory Size=2, RoHS=YES, Stock 1=196, Supplier 1=Newark
U3B U4B: Manufacturer Part Number=1186, Supplier 1=Pololu, Supplier Part Number 1=1186, Supplier Unit Price 1=9.95
U5B: "5V, 0.1A Fixed LDO", Dropout Voltage Vdo=900, Input Voltage Max=30, Input Voltage Min=0, LDO Regulator Case Style=SOT-23, Manufacturer 1="TEXAS INSTRUMENTS", Manufacturer Part Number=LM3480IM3-5.0, Operating Temperature Min="-40 C", Output Current=100, Supplier Part Number 1=83F3816, ComponentLink1Description=http://www.farnell.com/cad/1562346.zip, ComponentLink1URL=http://www.farnell.com/cad/1562346.zip, ComponentLink2Description=http://www.farnell.com/datasheets/1853525.pdf, ComponentLink2URL=http://www.farnell.com/datasheets/1853525.pdf, Description 1="TEXAS INSTRUMENTS - LM3480IM3-5.0 - LDO VOLTAGE REGULATOR, 5V, 0.1A, 3-SOT-23", No. of Pins=3, Pricing 1="1=1.24, 10=0.986, 100=0.757, 1000=0.529 (USD)", RoHS=NO, Stock 1=132, Supplier 1=Newark
U6BA U6BB: "Ideal Diode Controller with Reverse Input Protection, 4 to 80 V Vin, 8-pin SOP (MS8-8), 0 to 70 degC, Pb-Free", Current - Output (Max)=-, Current - Supply=150µA, Manufacturer 1="Linear Technology", Operating Temperature="0°C ~ 70°C", Package / Case="8-TSSOP, 8-MSOP (0.118\", 3.00mm Width)", Supplier Device Package=8-MSOP, Supplier Part Number 1=LTC4359CMS8#PBF-ND, Voltage - Supply="4 V ~ 80 V", Applications="Automotive, Redundant Power Supplies, Telecom Infrastructure", Category="Integrated Circuits (ICs)", ComponentLink1Description=http://www.linear.com/docs/41608, ComponentLink1URL=http://www.linear.com/docs/41608, Delay Time - OFF=300ns, Delay Time - ON=200µs, Description 1="IC OR CTRLR N+1 8MSOP", FET Type=N-Channel, Internal Switch(s)=No, Manufacturer Part Number=LTC4359CMS8#PBF, Mounting Type="Surface Mount", Packaging=Tube, Pricing 1="1=4.5, 25=3, 100=2.55 (USD)", Ratio - Input:Output=N:1, RoHS="RoHS Compliant", Stock 1=223, Supplier 1=Digi-Key, Type="N+1 ORing Controller"
X1B: library part "2x3 Header", "2x3 Header", Manufacturer 1=FCI, Manufacturer Part Number=67996-406HLF, Supplier Part Number 1=20M2191, ComponentLink1Description=http://www.farnell.com/datasheets/1876884.pdf, ComponentLink1URL=http://www.farnell.com/datasheets/1876884.pdf, Contact Plating="Tin Plated Contacts", Contact Termination Type="Through Hole", Description 1="FCI - 67996-406HLF - BOARD-BOARD CONNECTOR HEADER, 6 POSITION, 2ROW", Gender=Header, No. of Contacts=6, No. of Rows=2, Pitch Spacing=2.54, Pricing 1="1=0.254, 10=0.218, 25=0.186, 50=0.178, 100=0.16, 250=0.153, 500=0.128, 1000=0.117 (USD)", Product Range="BergStik 67996 Series", RoHS=YES, Stock 1=441, Supplier 1=Newark

## Via types
v1: diameter 29, hole 15, Top Layer to Bottom Layer, 44 vias
v2: diameter 50, hole 28, Top Layer to Bottom Layer, 1 vias

## Nets (pads, with @x,y where several pads share a name; then routed paths per layer and width w, separated by ;. In a path a pad name is that pad's centre, name@x,y a point inside that pad or via, vN(x,y) a via of type N, cw(c..) or ccw(c..) an arc to the next point about the centre after c; other vN are vias at no path point)
5V: C7B.1 U3B.5 U4B.5 U5B.1 | length 1099.5
  Top Layer w10: U4B.5 3059.33,1395 3059.33,2055 U3B.5
  Bottom Layer w10: U5B.1 2896.22,2205.94 2910,2219.72 2984.61,2219.72 U3B.5
BATTA: C4B.1 D5BA.1 D6BA.1 P1B.3 P1B.4 Q2BA.1 Q2BA.2 Q2BA.3 U6BA.2 U6BA.4 U6BA.5 | length 2073.5
  Bottom Layer w10: U6BA.4 169.36,1856.42 ; U6BA.5 169.36,1856.42 ; Q2BA.3 395.31,1896.38 D5BA.1 395.31,1782.36 377.75,1764.8 233.66,1764.8 220.54,1777.92 U6BA.2 220.54,1862.39 216.28,1866.65 179.6,1866.65 169.36,1856.42 ; D6BA.1@623.73,1898.82 D6BA.1@647.75,1874.8
  Bottom Layer w190: C4B.1@750,1000 750,905.01 1000,655.01 P1B.3 P1B.4 ; C4B.1 800,1048.43 800,1750
BATTB: C5B.1 D5BB.1 D6BB.1 P1B.1 P1B.2 Q2BB.1 Q2BB.2 Q2BB.3 U6BB.2 U6BB.4 U6BB.5 | length 1601.9
  Top Layer w10: D6BB.1@150,1371.26 D6BB.1@174.02,1395.28 ; Q2BB.3 402.44,1392.83 D5BB.1 402.44,1278.82 420,1261.26 564.09,1261.26 577.2,1274.38 U6BB.2 577.2,1358.85 581.46,1363.11 618.15,1363.11 628.39,1352.87 ; U6BB.4 628.39,1352.87 ; U6BB.5 628.39,1352.87
  Top Layer w190: 348.43,1210 348.43,751.57 450,650 P1B.1 P1B.2
"ELEC PWR CTRL SIGNAL": P8B.1 U2B.6 | length 677.3
  Top Layer w10: P8B.1 4010,1310 v1(4010,1480) ; v1(4010,1560) 4070,1620 U2B.6
  Bottom Layer w10: v1(4010,1480) v1(4010,1560)
GND: C1B.2 C2B.2 C3B.2 C4B.2 C5B.2 C6B.2 C7B.2 C8BA.1 C8BB.1 D1B.A D2B.A D6BA.2 D6BB.2 P1B.10 P5B.2 P6B.2 P7B.1 Q1B.S R6B.1 R7B.1 R8BA.1 R8BB.1 RX.1 S1B.3 S1B.4 S2B.1 S2B.2 TX.1 U1B.Vss U2B.8 U2B.18 U2B.30 U2B.38 U3B.3 U4B.3 U5B.3 X1B.6 | length 1525.5
  Top Layer w10: v1(140,1616.46) 140,1547.01 120.28,1566.73 D6BB.2 ; C8BB.1 v1(667.91,1650) 667.91,1680.91 R8BB.1 ; v1(3180,2380) U1B.Vss ; S2B.1 v1(3429.13,1320.87) ; S2B.2 v1(3429.13,1679.13) ; S1B.4 v1(3429.13,1820.87) ; S1B.3 v1(3429.13,2179.13) ; Q1B.S v1(3762.6,1897.4) ; U2B.38 v1(3918.5,2131.5) ; U2B.30 4007.01,2252.99 v1(4010,2250) ; U2B.8 v1(4132.99,1990) ; v1(4210,2120) 4221.5,2131.5 U2B.18 ; v2(4360,970) 4360,884.99 4414.45,830.54 RX.1 TX.1
  Bottom Layer w10: R8BA.1 v1(114.28,2157.78) 114.28,2115.55 C8BA.1 ; 620.01,1982.28 712.28,1982.28 ; D6BA.2 677.47,2070.28 D6BA.2@657.75,2050.55
NetC6B_1: C6B.1 REL1B.3 REL2B.4 U3B.1 U5B.2 | length 2014.8
  Top Layer w40: REL2B.4 2414.72,2399.61 U3B.1
  Top Layer w190: REL1B.3@1505.71,1326.77 1505.71,1505.71 2172.44,2172.44 REL2B.4@2172.44,2385
  Bottom Layer w10: U3B.1 2594.61,2219.72 2710,2219.72 2723.78,2205.94 U5B.2
NetD1B_K: D1B.K R1B.1 U2B.40 | length 839.7
  Top Layer w10: R1B.1@3200,2107.68 3239.17,2068.5 v1(3570,2068.5) U2B.40
  Bottom Layer w10: v1(3570,2068.5) D1B.K@3745.87,2068.5
NetD2B_K: D2B.K R2B.1 U2B.41 | length 1135.4
  Top Layer w10: R2B.1@3150,1642.32 3150,1923.94 3263.07,2037.01 v1(3500,2037.01) U2B.41
  Bottom Layer w10: v1(3500,2037.01) 3577.36,2037.01 D2B.K
NetD3_2: R5.2 TX.2 | length 300.4
  Top Layer w10: R5.2 4325.55,720 TX.2
NetD4_2: R6.2 RX.2 | length 303.8
  Top Layer w10: R6.2 4325.55,810 RX.2
NetD5BA_2: D5BA.2 Q2BA.4 U6BA.1 | length 189.7
  Bottom Layer w10: U6BA.1 315.54,1820.16 320.19,1824.8 ; D5BA.2 320.19,1824.8 ; Q2BA.4 320.19,1871.26 320.19,1824.8
NetD5BB_2: D5BB.2 Q2BB.4 U6BB.1 | length 189.7
  Top Layer w10: Q2BB.4 477.56,1367.72 477.56,1321.26 ; D5BB.2 477.56,1321.26 ; U6BB.1 482.2,1316.61 477.56,1321.26
NetF1B_2: F1B.2 Q1B.D S1B.1 S1B.2 | length 3365.9
  Top Layer w10: F1B.2 1388.82,1001.18 1408.46,981.54 1631.54,981.54 1660,1010 1660,1070 1718.46,1128.46 1838.26,1128.46 1900,1190.21 1900,1479.5 2510.5,2090 2780,2090 2950,2260 3240,2260 3280,2220 3280,2170.83 3340.83,2110 3520,2110 3538.19,2128.19 S1B.1 ; S1B.2 3639.13,1820.87 3697.4,1762.6 Q1B.D
NetF2B_2: F2B.2 P7B.2 | length 2150.8
  Top Layer w10: F2B.2 1880,1030 1990,1140 1990,1390 2260,1660 2559.89,1660 2624.33,1595.56 2624.33,1504.44 2898.77,1230 v1(2950,1230) ; v1(2950,980) 2950,950 P7B.2 ; v1(2950,1060) v1(2950,1170)
  Bottom Layer w10: v1(2950,980) v1(2950,1060) ; v1(2950,1170) v1(2950,1230)
NetP1B_5: P1B.5 R4B.2 U3B.2 | length 2021.9
  Top Layer w10: U3B.2 2564.33,1950 R4B.2
  Top Layer w40: P1B.5 1400,680 1710,990 1710,1040.93 1762.53,1093.46 1852.76,1093.46 1940,1180.71 1940,1470 2370,1900 U3B.2
NetP1B_6: P1B.6 P1B.7 R5B.2 U4B.2 | length 1294.4
  Top Layer w10: U4B.2 2564.33,1200 R5B.2
  Top Layer w190: P1B.6 1720.7,650 2070.7,1000 2364.33,1000 U4B.2
NetP1B_8: P1B.8 P2B.2 U2B.10 | length 3287.9
  Top Layer w10: P1B.8 2130,780 2380,780 2630.5,1030.5 3202.22,1030.5 3260,1088.28 3260,1408.28 3381.72,1530 4070,1530 4195.98,1655.98 v1(4195.98,1710) U2B.10 U2B.10@4201.65,1871.89 ; v1(4260,1710) 4440,1710 P2B.2
  Bottom Layer w10: v1(4195.98,1710) v1(4260,1710)
NetP1B_9: P1B.9 P2B.1 U2B.11 | length 3194.2
  Top Layer w10: P1B.9 2310,760 2388.28,760 2638.78,1010.5 3210.5,1010.5 3280,1080 3280,1400 3390,1510 4078.28,1510 4227.48,1659.2 ; U2B.11 4227.48,1659.2 ; P2B.1 4505,1655 4231.68,1655 4227.48,1659.2
NetP3B_1: P3B.1 U2B.22 | length 277.2
  Top Layer w10: U2B.22 4294.92,2255 4505,2255 P3B.1
NetP3B_2: P3B.2 U2B.23 | length 231.8
  Top Layer w10: U2B.23 4427.56,2322.44 P3B.2
NetP5B_1: P5B.1 U2B.13 | length 839.6
  Top Layer w10: U2B.13 4335.98,1974.02 4360,1950 v1(4360,1740) ; P5B.1 4280,1320 4280,1380 4360,1460 v1(4360,1620)
  Bottom Layer w10: v1(4360,1620) v1(4360,1740)
NetP6B_1: P6B.1 U2B.12 | length 803.6
  Top Layer w10: P6B.1 4200,1250 4260,1310 4260,1388.28 4320,1448.28 v1(4320,1620) ; U2B.12 4320,1914.96 v1(4320,1740)
  Bottom Layer w10: v1(4320,1620) v1(4320,1740)
NetR1B_2: R1B.2 U3B.4 | length 98.8
  Top Layer w10: U3B.4 3192.32,2200 R1B.2@3200,2192.32
NetR2B_2: R2B.2 U4B.4 | length 126.6
  Top Layer w10: U4B.4 3150,1495.67 R2B.2@3150,1557.68
NetR4B_1: R4B.1 R6B.2 U2B.43 | length 1180.9
  Top Layer w10: R4B.1 v1(2800,1950) v1(3020,1950) ; v1(3220,1950) 3244.02,1974.02 U2B.43
  Bottom Layer w10: R6B.2 2783.46,1933.46 v1(2800,1950) ; v1(3020,1950) v1(3220,1950)
NetR5_1: R5.1 U2B.2 | length 1425.2
  Top Layer w10: v1(3820,720) R5.1 ; v1(3900,1790) 3944.02,1834.02 U2B.2
  Bottom Layer w10: v1(3820,720) 3760,780 3760,1650 v1(3900,1790)
NetR5B_1: R5B.1 R7B.2 U2B.44 | length 1824.1
  Top Layer w10: R5B.1 v1(2800,1200) 3180,1200 3220,1240 3220,1830 3332.52,1942.52 U2B.44
  Bottom Layer w10: R7B.2 2783.46,1183.46 v1(2800,1200)
NetR6_1: R6.1 U2B.3 | length 1345.8
  Top Layer w10: v1(3820,800) 3973.07,800 R6.1 ; v1(3960,1790) 3975.51,1805.51 U2B.3
  Bottom Layer w10: v1(3820,800) 3790,830 3790,1638.28 3929.5,1777.78 3929.5,1779.5 3940,1790 v1(3960,1790)
NetR8BA_2: R8BA.2 U6BA.6 | length 217.7
  Bottom Layer w10: R8BA.2 181.21,2066.54 196.69,2051.06 196.69,1991.18 U6BA.6
NetR8BB_2: R8BB.2 U6BB.6 | length 217.7
  Top Layer w10: U6BB.6 601.06,1487.64 601.06,1547.52 616.54,1562.99 R8BB.2
NetREL2B_3: REL2B.3 U4B.1 | length 440.1
  Top Layer w190: REL2B.3 2409.45,1550 U4B.1
NetU2B_1: U2B.1
NetU2B_34: U2B.34 X1B.1 | length 652.8
  Top Layer w10: U2B.34 3902.52,2257.48 3940,2220 4120,2220 v1(4160,2180)
  Bottom Layer w10: v1(4160,2180) 4430,2180 4450,2160 X1B.1
NetU2B_42: U2B.42
PRE_3V3: C1B.1 C3B.1 R3B.2 U1B.Vout U2B.9 U2B.19 U2B.31 U2B.39 X1B.2 | length 2497.4
  Top Layer w10: U1B.Vout 3337.72,2420 v1(3390,2420) 3390,2270 3424.53,2235.47 3594.53,2235.47 3610,2220 3610,2120 3630,2100 U2B.39 3980,2100 4000,2080 4187.5,2080 ; v1(3970,2170) 3970,2105.51 3975.51,2100 ; v1(3970,2250) 3975.51,2255.51 U2B.31 ; U2B.9 4164.49,1934.49 v1(4210,1980) 4210,2060 4180.5,2089.5 4180.5,2132.22 4211.27,2162.99 U2B.19 4367.01,2162.99 4425,2105 4505,2105 ; R3B.2@4542.32,1850 4505,1887.32 4505,2105 ; X1B.2 4505,2105
  Bottom Layer w10: v1(3390,2420) 3423.58,2386.42 C1B.1 ; v1(3970,2170) v1(3970,2250) ; C3B.1@4174.61,1920 4174.61,1944.61 v1(4210,1980)
RAW_24V: C2B.1 C8BA.2 C8BB.2 D3B.2 D4B.2 Q2BA.5 Q2BA.6 Q2BA.7 Q2BA.8 Q2BB.5 Q2BB.6 Q2BB.7 Q2BB.8 REL1B.2 REL1B.4 REL2B.2 U1B.SHDN U1B.Vin U6BA.8 U6BB.8 | length 5996.6
  Top Layer w10: Q2BB.5 450,1551.26 515.35,1485.91 U6BB.8 ; Q2BB.5@453.54,1596.46 C8BB.2 ; 1280,1910 1280,1319.61 D3B.2 D4B.2 ; 1550,2250 REL2B.2 v1(2040,2250) ; v1(2310,2250) 2380,2180 2760,2180 2970,2390 v1(3030,2390) 3060,2420 U1B.Vin@3230,2420 ; U1B.Vin 3262.6,2417.4 3280,2400 3280,2360 3297.4,2342.6 U1B.SHDN
  Top Layer w190: 350,1700 500,1850 1150,1850 1505.71,2205.71 REL1B.4@1505.71,2380
  Bottom Layer w10: U6BA.8 282.39,1989.45 347.75,2054.8 Q2BA.5 ; C8BA.2 Q2BA.5@344.2,2100 ; 1033.27,2133.27 REL1B.2@1033.27,2263.78 ; v1(2040,2250) v1(2310,2250) ; v1(3030,2390) 3043.58,2376.42 C2B.1
  Bottom Layer w190: 850,2150 950,2050 1200,2050 1500,2350 REL1B.4@1500,2380
"REL1 DRIVER": Q1B.G U2B.5 | length 322.2
  Top Layer w10: Q1B.G 3837.4,1862.59 3901.82,1927.01 4017.71,1927.01 4032.83,1911.88 4032.83,1877.56 U2B.5 U2B.5@4038.5,1848.91
"REL RETURN A": D3B.1 F1B.1 REL1B.1 | length 446
  Top Layer w10: REL1B.1@1033.27,1397.64 1100,1330.91 1100,1090 1150,1040 F1B.1
"REL RETURN B": D4B.1 F2B.1 REL2B.1 | length 608.5
  Top Layer w10: F2B.1 1650,1090 1650,1200 ; REL2B.1 1683.86,1383.86 1650,1350 1650,1200 ; D4B.1 1650,1200
RESET: R3B.1 U2B.35 X1B.5 | length 905.5
  Top Layer w10: U2B.35 3904.02,2225.98 3930,2200 4070,2200 v1(4130,2140) ; X1B.5 4450,1857.68 R3B.1@4457.68,1850
  Bottom Layer w10: v1(4130,2140) 4186.06,2140 4201.56,2155.5 4344.5,2155.5 4400,2100 4400,2000 X1B.5 X1B.5@4440,1940
SHDN_SIGNAL: S2B.3 S2B.4 U2B.4 | length 592.2
  Top Layer w10: S2B.4@3550,1679.13 3899.13,1679.13 4007.01,1787.01 U2B.4
pads on no net: H1B.0 P8B.2 U1B.NC U2B.7 U2B.14 U2B.15 U2B.16 U2B.17 U2B.20 U2B.21 U2B.24 U2B.25 U2B.26 U2B.27 U2B.28 U2B.29 U2B.32 U2B.33 U2B.36 U2B.37 U6BA.3 U6BA.7 U6BB.3 U6BB.7 X1B.3 X1B.4

## Polygon pours and split planes (outlines as drawn)
BATTB on Top Layer "Batt B Bus Plane" (solid, pour order 21): 430,1451.26 430,1251.26 430,1150 230,1150 230,1251.26 60,1251.26 60,1451.26
RAW_24V on Top Layer "Merge Power Plane B" (solid, pour order 20): 60,1690.92 60,1531.26 510,1531.26 510,1691.38
RAW_24V on Bottom Layer "Merge Power Plane A" (solid, pour order 22): 900,2299.79 900,2031.75 266.26,2031.75 266.26,2300.45
BATTA on Bottom Layer "Batt A Bus Plane" (solid, pour order 23): 375,1960 375,1760 575,1760 900,1760 900,1890 725,1890 725,1960
GND on Bottom Layer "Ground Plane" (solid, pour order 24): 0,2500 0,0 4650,0 4650,2500

## Keep-outs
Keep-Out Layer:
  the board outline again, w20

## Silkscreen, mask and mechanical layers (free items; w line width, h text height)
Top Overlay:
  drawing of 2585 lines, arcs and shapes, not listed
  text "4.65 x 2.50 inch" at 2520,2580 h180
  text "UART" at 4500,2370 h30
  text "Sponsored By:" at 330,2240 h30 r270
  text "PROGRAM" at 4380,1900 h30 r90
  text "Electronics Bus" at 2350,1850 h30 r90
  text "START" at 3700,1850 h60 r90
  text "I2C" at 4500,1600 h30
  text "KILL" at 3700,1400 h60 r90
  text "Elec. Power SHDN" at 4020,1400 h30 r270
  text "Remote Master Power" at 4220,1400 h30 r270
  text "Remote Elec. Pwr" at 4420,1400 h30 r270
  text "Thruster Bus" at 2350,1150 h30 r90
  text "Kill SW / Override" at 2530,750 h60
  text "Sponsored By:" at 3390,700 h30
  text "URC" at 4000,450 h180
  text "Power Board" at 2950,150 h180
Bottom Overlay:
  text "24V Thrust" at 1730,600 h60 r90
  text "Batt Bus B" at 730,590 h60 r90
  text "Batt Bus A" at 1139.98,590 h60 r90
  text "24V Elec." at 1429.98,580 h60 r90
  text "SDA" at 2009.99,580 h60 r90
  text "SCL" at 2209.99,580 h60 r90
  text "GND" at 2419.99,580 h60 r90

## Text inside footprints (layer, text, board x,y; h text height)
C4B: Top Overlay "+" at 731.89,897.64 h60
C5B: Top Overlay "+" at 281.89,897.64 h60
U3B: Top Overlay "Vcc" at 2914.33,2080 h40; Top Overlay "Vo" at 2944.33,2180 h40; Top Overlay "GND" at 2914.33,1980 h40; Top Overlay "IP+" at 2604.33,2280 h40; Top Overlay "IP-" at 2604.33,1870 h40
U4B: Top Overlay "Vcc" at 2914.33,1330 h40; Top Overlay "Vo" at 2944.33,1430 h40; Top Overlay "GND" at 2914.33,1230 h40; Top Overlay "IP+" at 2604.33,1530 h40; Top Overlay "IP-" at 2604.33,1120 h40